# Altium PCB HAL_2.PcbDoc
Units mil, origin at the board's own origin, x right, y up, seen from the top; angles counter-clockwise.
Board outline 5545 x 3120 mil, 2 copper layers (Top Layer, Bottom Layer); 70 components, 32 nets, 213 pads, 88 vias.
Unrouted connection lines stored in the file: 39.
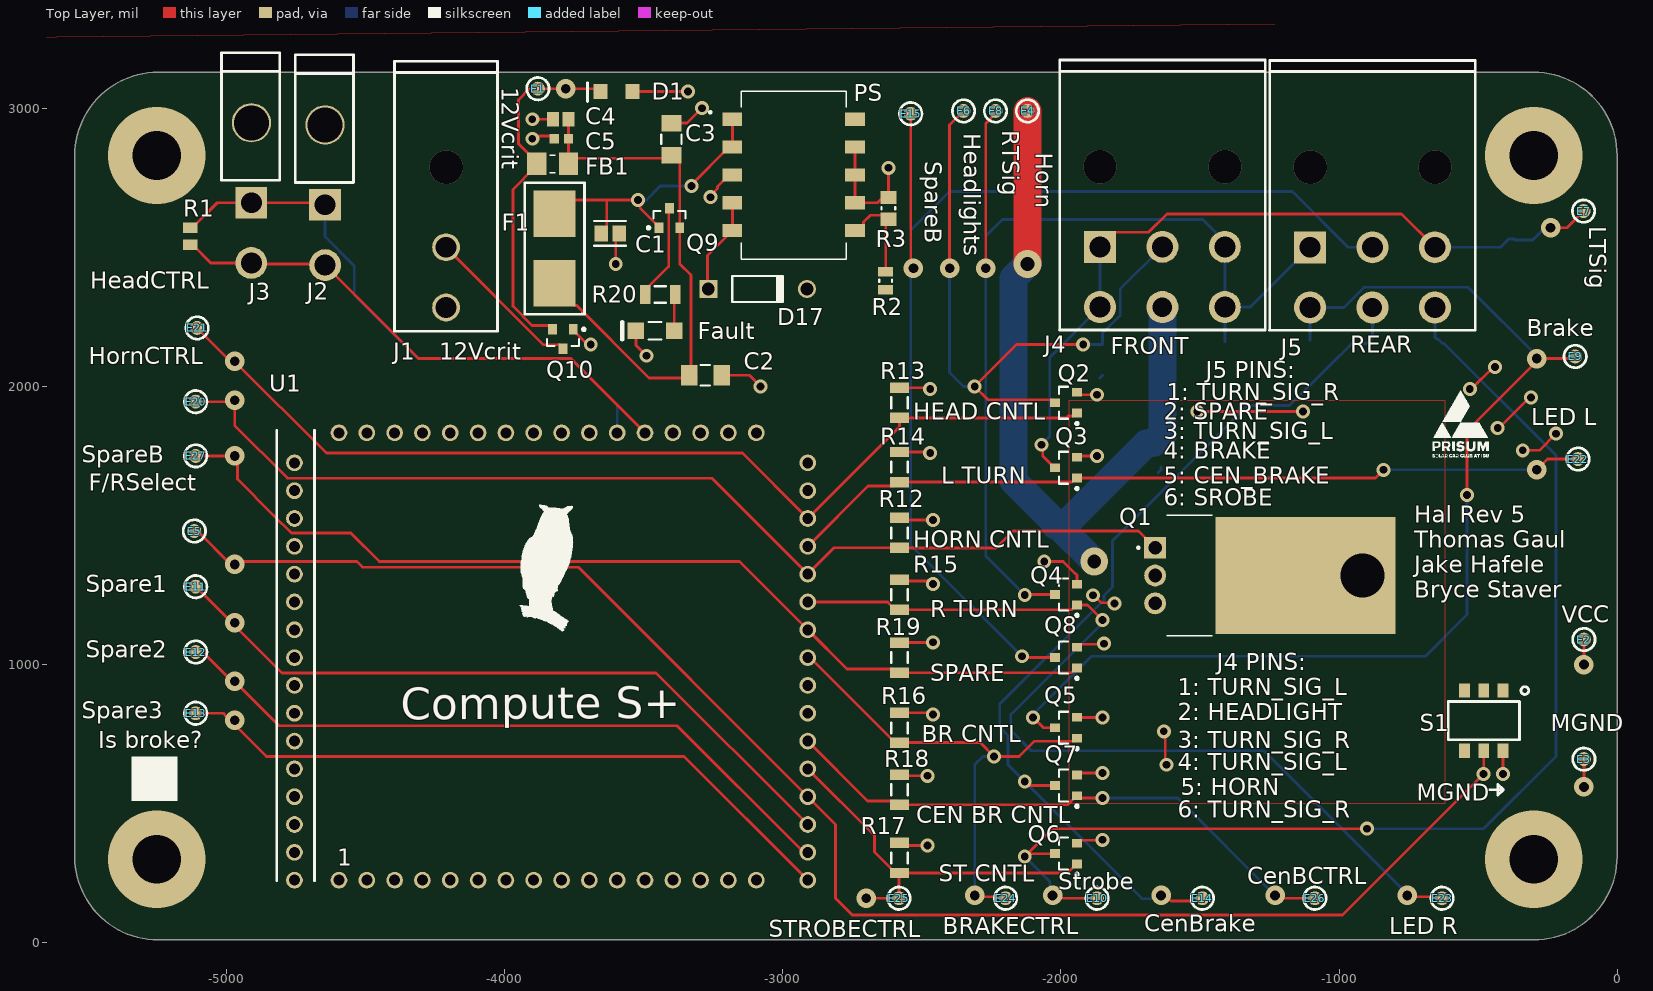
[diagram p0: Top Layer view]
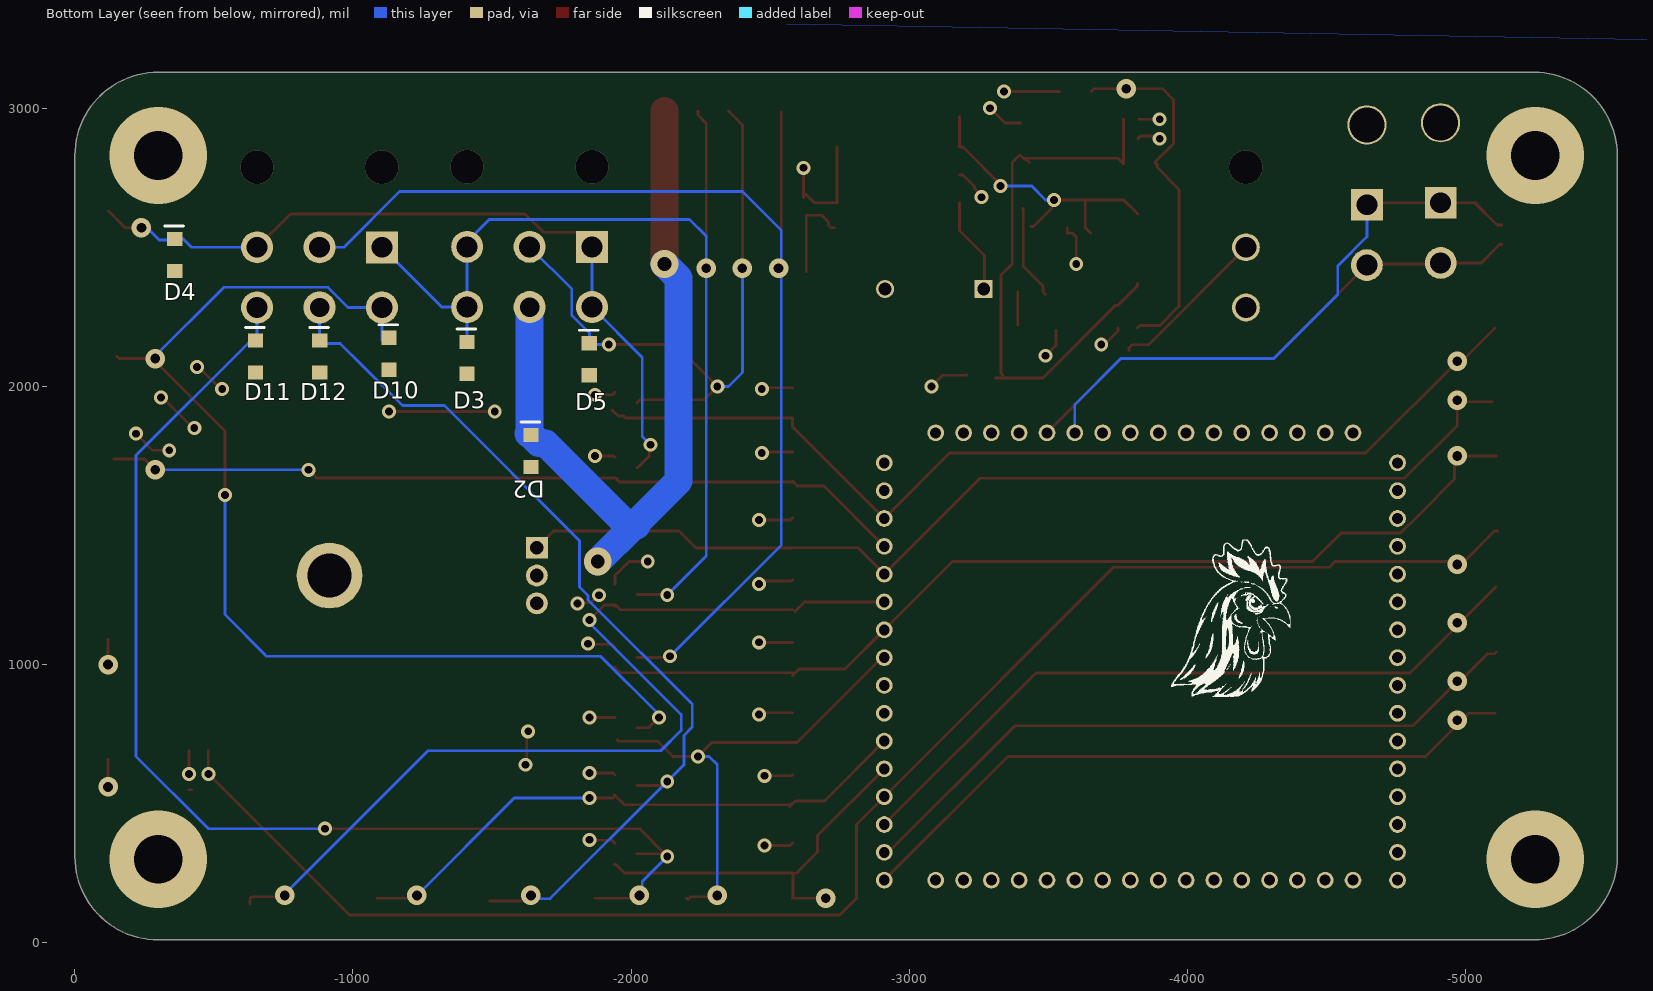
[diagram p1: Bottom Layer view, seen from below]

## Layer stack, top to bottom
Top Solder: solder mask 0.4, Solder Resist, Dk 3.5
Top Layer: signal copper 1.4
Dielectric 1: dielectric 12.6, FR-4, Dk 4.8
Bottom Layer: signal copper 1.4
Bottom Solder: solder mask 0.4, Solder Resist, Dk 3.5

## Board outline
-5545,310 -5545,2829.37 cw(c-5245,2829.37) -5245,3129.37 -5245,3130 -300,3130 -300.63,3129.37 cw(c-300.63,2829.37) -0.63,2829.37 0,2825 0,310 -0.63,310 cw(c-300.63,310) -300.63,10 -5245,10 cw(c-5245,310)

## Design rules (kind name [scope] priority, off if disabled: settings)
BoardOutlineClearance [All] p1: gap=10 ignorepadtopadclearanceinfootprint=FALSE except(0: Arc-SplitContinuation Track-SplitContinuation SMDPad-SplitContinuation THPad-SplitContinuation Via-SplitContinuation Fill-SplitContinuation Poly-SplitContinuation Region-SplitContinuation Text-SplitContinuation)
Clearance [All] p1: gap=10 ignorepadtopadclearanceinfootprint=FALSE except(0: Arc-Hole Track-Hole SMDPad-Hole THPad-Hole Via-Hole Fill-Hole Poly-Hole Region-Hole Text-Hole)
PolygonConnect [All] p1: connectstyle=Relief reliefconductorwidth=10 reliefentries=4 polygonreliefangle="90 Angle" airgapwidth=10
RoutingVias [All] p1: holewidth=28 width=50 viastyle="Through Hole" minholewidth=28 minwidth=50 maxholewidth=28 maxwidth=50
SolderMaskExpansion [All] p1: expansion=4 istentingtop=FALSE
Width Width_2 [InNet('HORN')] p1: maxlimit=100 minlimit=100 preferedwidth=100 minimp=50.000000 maximp=50.000000 favimp=50.000000
Width Width_1 [All] p2: maxlimit=10 minlimit=10 preferedwidth=10
Width [All] p3: maxlimit=40 minlimit=40 preferedwidth=40 minimp=50.000000 maximp=50.000000 favimp=50.000000
30 further rules are at their usual default settings.

## Classes and differential pairs
component class HAL_3: E4 E5 E6 E7 E8 E9 E10 E14 E15 E20 E21 E22 E23 E24 E25 E26 E27 Q1 Q2 Q3 Q4 Q5 Q6 Q7 Q8 R12 R13 R14 R15 R16 R17 R18 R19 S1
component class HAL_2: C1 C2 C3 C4 C5 D1 D2 D3 D4 D5 D10 D11 D12 D17 E1 E2 E3 E11 E12 E13 F1 Fault FB1 J1 J2 J3 J4 J5 PS Q9 Q10 R1 R2 R3 R20 U1

## Components (designator, comment, footprint, x,y, rotation, side; value= is the part's Value field where it differs from the comment)
C1 "25V" FP-GRM21B-0_2-e0_2_0_7-IPC_B -3620,2550 r0 top
C2 "10 uF" FP-CL31-IPC_A -3278.12,2040 r0 top
C3 "1 uF" FP-CL31-IPC_A -3400,2888.12 r90 top
C4 ".1 uF" CAPC2013X140X50LL20T25 -3797.56,2960 r0 top
C5 ".01 uF" CAPC1608X90X35LL15T15 -3795.59,2890 r0 top
D1 "TVS DIODE 12.4V 20.1V DO219AB" "TVS DIODE 12.4V 20.1V DO219AB" -3598,3060 r0 top
D2 "TVS DIODE 12.4V 20.1V DO219AB" "TVS DIODE 12.4V 20.1V DO219AB" -1640,1768 r270 bottom
D3 "TVS DIODE 12.4V 20.1V DO219AB" "TVS DIODE 12.4V 20.1V DO219AB" -1410,2103 r270 bottom
D4 "TVS DIODE 12.4V 20.1V DO219AB" "TVS DIODE 12.4V 20.1V DO219AB" -360,2473 r270 bottom
D5 "TVS DIODE 12.4V 20.1V DO219AB" "TVS DIODE 12.4V 20.1V DO219AB" -1850,2098 r270 bottom
D10 "TVS DIODE 12.4V 20.1V DO219AB" "TVS DIODE 12.4V 20.1V DO219AB" -1130,2118 r270 bottom
D11 "TVS DIODE 12.4V 20.1V DO219AB" "TVS DIODE 12.4V 20.1V DO219AB" -650,2108 r270 bottom
D12 "TVS DIODE 12.4V 20.1V DO219AB" "TVS DIODE 12.4V 20.1V DO219AB" -880.98,2108 r270 bottom
D17 "1N4001-T" DIOD-DO-41-P-2_V -3090,2350 r0 top
E1 "12V crit" EPAD -3880,3070 r0 top
E2 "VCC" EPAD -120,1090 r0 top
E3 "MGND" EPAD -120,660 r0 top
E4 "HORN" EPAD -2120,2990 r0 top
E5 "F/R Selector" EPAD -5115,1480 r0 top
E6 "HEADLIGHT" EPAD -2350,2990 r0 top
E7 "L T SIGNAL" EPAD -121.31,2630 r0 top
E8 "R T SIGNAL" EPAD -2235,2990 r0 top
E9 "Brake" EPAD -151.31,2107.5 r0 top
E10 "STROBE" EPAD -1870,160 r0 top
E11 "SPARE 1" EPAD -5110,1280 r0 top
E12 "SPARE 2" EPAD -5110,1045 r0 top
E13 "SPARE 3" EPAD -5110,825 r0 top
E14 "CENTER BRAKE" EPAD -1491.67,160 r0 top
E15 "SPARE BREAK" EPAD -2540,2980 r0 top
E20 "HORN CTRL" EPAD -5110,1945 r0 top
E21 "HEADLIGHT CTRL" EPAD -5105,2210 r0 top
E22 "LED T SIGNAL L" EPAD -141.31,1738.75 r0 top
E23 "LED T SIGNAL R" EPAD -630,160 r0 top
E24 "BRAKE CTRL" EPAD -2198.89,160 r0 top
E25 "STROBECTRL" EPAD -2582.15,160 r0 top
E26 "CENTER BRAKE CTRL" EPAD -1087.22,160 r0 top
E27 "SPACR B" EPAD -5110,1750 r90 top
F1 "1A" "OMNIBLOCK FUSE HOLDER" -3820,2495.39 r90 top
Fault "HSMH-C150" AVAG-HSMX-C150_V -3458.9,2200 r180 top
FB1 "HI1206N800R-10" FB_HI1206N800R-10 -3826.89,2800 r0 top
J1 "Power Input 12 V" CONN_2P_MEGAFIT_HORIZONTAL -4210,2283.46 r90 top
J2 "CAN" "Mini-Fit Jr. 2" -4645,2770.71 r180 top
J3 "CAN" "Mini-Fit Jr. 2" -4910,2778.11 r180 top
J4 "FRONT" PCBComponent_1 -2192.87,2171.22 r180 top
J5 "REAR" PCBComponent_1 -1437.87,2169.69 r180 top
PS "R-78AA5.0-1.0SMD-R" CONV_R-78AA5.0-1.0SMD-R -2960.47,2760 r0 top
Q1 "CSD18504KCS" TO254P1651X1067X470-3 -1661.34,1420 r270 top
Q2 "NTR4501NT1G" ONSC-SOT-23-3-318-08_V -1981.63,1941.28 r180 top
Q3 "NTR4501NT1G" ONSC-SOT-23-3-318-08_V -1981.63,1707.59 r180 top
Q4 "NTR4501NT1G" ONSC-SOT-23-3-318-08_V -1981.63,1251.5 r180 top
Q5 "NTR4501NT1G" ONSC-SOT-23-3-318-08_V -1981.63,772.81 r180 top
Q6 "NTR4501NT1G" ONSC-SOT-23-3-318-08_V -1981.63,320.42 r180 top
Q7 "NTR4501NT1G" ONSC-SOT-23-3-318-08_V -1981.63,565.42 r180 top
Q8 "NTR4501NT1G" ONSC-SOT-23-3-318-08_V -1981.63,1025.2 r180 top
Q9 "IRLML6402TRPBF" INTR-SOT-23-3_V -3407.4,2604.84 r0 top
Q10 "IRLML6402TRPBF" INTR-SOT-23-3_V -3790,2170 r180 top
R1 "120 Ohmn" RESC2013X50X40LL20T20 -5130,2540 r90 top
R2 "33k" RESC2013X50X30LL20T20 -2630,2380 r270 top
R3 "8.66k" RESC2013X60X35ML10T20 -2620,2640 r270 top
R12 "1k" RESC3216X70X40LL20T20 -2580,1473.48 r90 top
R13 "1k" RESC3216X70X40LL20T20 -2580,1940.86 r90 top
R14 "1k" RESC3216X70X40LL20T20 -2580,1710 r90 top
R15 "1k" RESC3216X70X40LL20T20 -2580,1251.09 r90 top
R16 "1k" RESC3216X70X40LL20T20 -2580,772.39 r90 top
R17 "1k" RESC3216X70X40LL20T20 -2580,305 r90 top
R18 "1k" RESC3216X70X40LL20T20 -2580,550 r90 top
R19 "1k" RESC3216X70X40LL20T20 -2580,1024.78 r90 top
R20 "1k" RESC3216X70X40LL20T20 -3440,2330 r0 top
S1 "Slide Switch" "Slide Switch" -686.69,827.8 r180 top
U1 "S+" "Compute S+" -4595,225 r0 top

## Footprints (in the part's own frame and the unit in brackets; to place one, negate y for a bottom-side part, rotate by r counter-clockwise, add the part's x,y. Pads: shape width x height; smd on the part's side, far side on the other; paste and mask are expansions set on the pad)
AVAG-HSMX-C150_V [mm] "SMD, 2-Leads, Body 3.2x1.6mm"
  rect 1.5x1.5 smd: 1(-1.75,0) 2(1.75,0)
  silkscreen extent -0.6,-0.8 3,0.8, body extent -1.6,-0.8 1.6,0.8, height 1.1
CAPC1608X90X35LL15T15 [mm] "Chip Capacitor, 2-Leads, Body 1.60x0.81mm, IPC High Density"
  rect 0.85x0.9 smd: 1(-0.65,0) 2(0.65,0)
  body extent -0.88,-0.48 0.87,0.48, height 0.9
CAPC2013X140X50LL20T25 [mm] "Chip Capacitor, 2-Leads, Body 2.00x1.25mm, IPC High Density"
  rect 1.1x1.35 smd: 1(-0.7,0) 2(0.7,0)
  body extent -1.1,-0.72 1.1,0.72, height 1.4
"Compute S+" [mil]
  round 60 hole 39.37: CANH(1000,1607.95) CANL(1100,1607.95) GND(-160,900) GND(100,1607.95) GND(600,0) GND(900,1607.95) GND(1685,600) GND(1685,1400) PA00(-160,1500) PA01(-160,1400) PA02(-160,1300) PA03(-160,1200) PA04(-160,300) PA05(-160,200) PA06(-160,100) PA07(-160,0) PA08(0,0) PA09(100,0) PA10(200,0) PA11(300,0) PA12(1200,0) PA13(1300,0) PA14(1400,0) PA15(1500,0) PA16(1685,0) PA17(1685,100) PA18(1685,200) PA19(1685,300) PA20(1685,800) PA21(1685,900) PA22(1685,1000) PA23(1685,1100) PA24(1685,1200) PA25(1685,1300) PA27(1500,1607.95) PA28(1400,1607.95) PA30(1300,1607.95) PA31(1200,1607.95) PB00(500,1607.95) PB01(400,1607.95) PB02(300,1607.95) PB03(200,1607.95) PB04(-160,1100) PB05(-160,1000) PB06(-160,700) PB07(-160,600) PB08(-160,500) PB09(-160,400) PB10(400,0) PB11(500,0) PB12(800,0) PB13(900,0) PB14(1000,0) PB15(1100,0) PB16(1685,400) PB17(1685,500) PB30(700,1607.95) PB31(600,1607.95) VDD(-160,800) VDD(0,1607.95) VDD(700,0) VDD(800,1607.95) VDD(1685,700) VDD(1685,1500)
  silkscreen extent -224,-2 842,1617, body extent -261,-84 1774,1726, height 549
CONN_2P_MEGAFIT_HORIZONTAL [mm]
  round 2.54 hole 1.905: 1(0,0) 2(5.5,0)
  silkscreen extent -2.16,-4.7 22.48,4.7, body extent -0.64,-4.16 21.33,4.19, height 14.06
CONV_R-78AA5.0-1.0SMD-R [mm]
  rect 1.8x1.2 smd: 1(-5.6,5.08) 2(-5.6,2.54) 3(-5.6,0) 4(-5.6,-2.54) 5(-5.6,-5.08) 6(5.6,-5.08) 7(5.6,-2.54) 8(5.6,0) 9(5.6,2.54) 10(5.6,5.08)
  silkscreen extent -7.72,-7.68 4.8,7.62
DIOD-DO-41-P-2_V [mm] "2-Leads, Axial Lead, Body 4.635x2.36mm, Pin Spacing 9mm"
  rect 1.65x1.65 hole 1.15: 1(-4.5,0)
  round 1.65 hole 1.15: 2(4.5,0)
  silkscreen extent -2.32,-1.18 2.32,1.18, body extent -4.93,-1.18 4.93,1.18, height 2.35
EPAD [mil]
  round 50 smd: 1(0,0)
  silkscreen extent -40,-40 40,40
FB_HI1206N800R-10 [mm]
  rect 1.76x2.06 smd: 1(-1.445,0) 2(1.445,0)
  silkscreen extent -0.25,-0.8 0.25,0.8
FP-CL31-IPC_A [mil]
  rect 59.27x73.16 smd paste+0 mask+0: 1(-58.12,0) 2(58.12,0)
  silkscreen extent -17,-37 17,37, body extent -107,-56 107,56, height 10
FP-GRM21B-0_2-e0_2_0_7-IPC_B [mil]
  rect 49.4x57.33 smd paste+0 mask+0: 1(-32.51,0) 2(32.51,0)
  silkscreen extent -57,-44 57,44, body extent -67,-39 67,39, height 10
INTR-SOT-23-3_V [mm] "SOT23, 3-Leads, Body 2.92x1.3mm, Pitch 1.9mm"
  rect 0.802x0.972 smd: 1(-0.95,-0.885) 2(0.95,-0.885) 3(0,0.885)
  silkscreen extent -2.03,-1.01 1.46,0.64, body extent -1.46,-0.65 1.46,0.65, height 1.12
"Mini-Fit Jr. 2" [mm]
  rect 2.9x2.9 hole 1.9: 1(0,3)
  round 2.9 hole 1.9: 2(0,8.5)
  round 3.578 hole 3.2: 3(0,-4.3)
  silkscreen extent -2.6,-10.7 2.73,0.95, body extent -2.7,-10.9 3.1,9.03, height 11.4
"OMNIBLOCK FUSE HOLDER" [mm]
  rect 4.24x3.81 smd: 1(-3.185,0) 2(3.185,0)
  silkscreen extent -6,-2.73 6,2.73, body extent -4.92,-2.52 4.92,2.51, height 3.81
ONSC-SOT-23-3-318-08_V [mm] "SOT23, 3-Leads, Body 2.92x1.3mm, Pitch 0.95mm"
  rect 0.9x0.8 smd: 1(-1,0.95) 2(-1,-0.95) 3(1,0)
  silkscreen extent -1.13,-1.46 0.65,2.02, body extent -0.65,-1.46 0.65,1.46, height 1.11
PCBComponent_1 [mil]
  rect 115x115 hole 75: 1(-333.46,-330.31)
  round 115 hole 75: 2(-557.87,-330.31) 3(-782.28,-330.31) 4(-333.46,-113.78) 6(-782.28,-113.78)
  round 115 hole 70: 5(-557.87,-113.78)
  silkscreen extent -927,-1002 -187,-32, body extent -908,-956 -209,-92, height 594
RESC2013X50X30LL20T20 [mm] "Chip Resistor, 2-Leads, Body 2.00x1.25mm, IPC High Density"
  rect 0.85x1.35 smd: 1(-0.825,0) 2(0.825,0)
  silkscreen extent -0.1,-0.58 0.1,0.58, body extent -1.1,-0.72 1.1,0.72, height 0.5
RESC2013X50X40LL20T20 [mm] "Chip Resistor, 2-Leads, Body 2.00x1.25mm, IPC High Density"
  rect 0.95x1.35 smd: 1(-0.775,0) 2(0.775,0)
  body extent -1.1,-0.72 1.1,0.72, height 0.5
RESC2013X60X35ML10T20 [mm] "Chip Resistor, 2-Leads, Body 2.00x1.25mm, IPC Low Density"
  rect 1.2x1.45 smd: 1(-1,0) 2(1,0)
  silkscreen extent -0.1,-0.63 0.1,0.63, body extent -1.05,-0.67 1.05,0.67, height 0.6
RESC3216X70X40LL20T20 [mm] "Chip Resistor, 2-Leads, Body 3.20x1.60mm, IPC High Density"
  rect 0.95x1.7 smd: 1(-1.375,0) 2(1.375,0)
  silkscreen extent -0.5,-0.75 0.5,0.75, body extent -1.7,-0.9 1.7,0.9, height 0.7
"Slide Switch" [mm]
  rect 1x1.3 smd: 1(-7,-2) 2(-5.25,-2) 3(-3.5,-2) 4(-7,3.5) 5(-5.25,3.5) 6(-3.5,3.5)
  silkscreen extent -9.35,-2.35 -2,2.5
TO254P1651X1067X470-3 [mm]
  rect 2x2 hole 1.24: 1(0,0)
  round 2 hole 1.24: 2(2.54,0) 3(5.08,0)
  rect 10.67x16.43 smd: 4(2.54,13.75)
  round 6 hole 4: 4.1(2.54,18.925)
  silkscreen extent -2.98,-1.62 8.06,5.22, body extent -5.08,0 5.08,4.55, height 19.65
"TVS DIODE 12.4V 20.1V DO219AB" [mil]
  rect 51x55 smd: 3(-57,0) 4(58,0)
  silkscreen extent -104,-36 -104,31

## Part data
C1: library part CMP-03020-001866-1, "C0805 10 pF C0G 30ppm/°C 2.00% 50 V", Capacitance=22uF, Case Code (Imperial)=0805, Case Code (Metric)=2012, Dielectric=X5R, Max Operating Temperature=85°C, Min Operating Temperature=-55°C, Package Quantity=3000, Resistor Type=Ceramic, Tolerance=20%, Case/Package=0805, Depth=1.25mm, Height=1.25mm, Lead Free="Lead Free", Length=2mm, Material=Ceramic, Mount="Surface Mount", Packaging="Tape and Reel", REACH SVHC="No SVHC", Termination=SMD/SMT, Thickness=0.057inch, Voltage=25V, Voltage Rating=25V, Voltage Rating (DC)=25V, Weight=0.000335oz, Width=1.25mm
C2 C3: library part CMP-13271-002819-1, "Cap Ceramic 10uF 16V X5R ±10% SMD 1206 +85°C Embossed T/R", Capacitance=10uF, Case Code (Imperial)=1206, Case Code (Metric)=3216, Dielectric=X5R, Max Operating Temperature=85°C, Min Operating Temperature=-55°C, Tolerance=10%, Voltage=16V, Case/Package=1206, Contact Plating=Tin, Depth=1.6mm, Height=1.6mm, Lead Free="Lead Free", Length=3.2mm, Material=Ceramic, Mount="Surface Mount", Packaging="Tape and Reel", Radiation Hardening=No, Thickness=0.071inch, Voltage Rating=16V, Voltage Rating (DC)=16V, Width=0.063inch
C4: library part CMP-2007-04740-1, Manufacturer="AVX Interconnect / Elco", Part Number=08051C104M4Z2A
C5: library part CMP-2006-04438-1, Manufacturer="AVX Interconnect / Elco", Part Number=06035C472K4T4A
D17: library part CMP-0639-00006-2, "1.0 A Rectifier, 15 pF, 50 V, -65 to 150 degC, 2-Pin DO-41 Plastic, RoHS, Tape and Reel", Manufacturer="Diodes Inc", Max. Average Rectified Current IO (A)=1, Operating Temperature Range (degC)="-65 to 150", ComponentLink1Description="Manufacturer URL", ComponentLink1URL=http://diodes.com/, ComponentLink2Description=Datasheet, ComponentLink2URL=http://diodes.com/datasheets/ds28002.pdf, CT (pF)=15, DatasheetVersion="Rev. 8-2", Max. IFSM (A)=30, Max. IR (uA)=5, Mounting Technology="Through Hole", PackageDescription="2-Pin Axial Lead, Body 4.635 x 2.36 mm, Lead Spread 25.4 mm", PackageReference=DO-41-P-2, Packing="Tape and Reel", PartNumber=1N4001-T, RoHS=TRUE, VF (V)=1, VRRM (V)=50
E1 E2 E3 E4 E5 E6 E7 E8 E9 E10 E11 E12 E13 E14 E15 E20 E21 E22 E23 E24 E25 E26 E27: library part EPAD, "Pad for probing signals"
F1: library part CMP-2000-05464-1, "Fuse Holder, 20 A, 500 V, -50 to 145 degC, 4-Pin THD, RoHS", Digikey-Fuse=http://www.digikey.com/product-detail/en/littelfuse-inc/0451001.MRL/F2577CT-ND/813055, Digikey-Socket=http://www.digikey.com/product-detail/en/littelfuse-inc/01550900M/F1889-ND/2519878
Fault: library part CMP-2000-06426-1, "LED Uni-Color Red, 65 mW, 25 mA, -40 to 85 degC, 2-Pin SMD, RoHS, Tape and Reel", Emitting Color=Red, Forward Current=25mA, Forward Voltage=2.6V, Manufacturer=Avago, Operating Temp Range=-40Cto85C, Operating Temperature Classification=Industrial, Package Description="2-Pin Surface Mount Device, Body 3.2 x 1.6 mm", Package Reference=HSMX-C150, Package Type=ChipLed, Power Dissipation=78W, Reverse Voltage=5V, Test Current (It)=20mA, Chip Material=GaAlAs, Datasheet URL=http://media.digikey.com/pdf/Data%20Sheets/Avago%20PDFs/HSMz-Czzz.pdf, Datasheet Version=03/2012, DELETED=Compliant, Dominant Wave Length=639nm, High Brightness=No, Lens Dimensions=2x1.6x0.6mm, Lens Type=ColorlessDiffused, Lum Intensity=17mcd, Luminous Intensity=17mcd, Main Category=ChipLED, Manufacturer URL=http://www.avagotech.com/, Mounting=SurfaceMount, Mounting Technology=SurfaceMount, Number of  Elements=1, Packaging=TapeandReel, Peak Wavelength=660nm, Pin Count=2, Product Depth (mm)=1.6mm, Product Height (mm)=1.1mm, Product Length (mm)=3.2mm, Rad Hardened=No, Shape Type=Rectangular, Type=Uni-Color, Viewing Angle=170deg
FB1: library part 80_FB_1206, "Ferrite Chip, 1 Function(s), 3A, 2 Pin(s)", Package="1206 Laird-Signal Integrity", Check_prices=https://www.snapeda.com/parts/HI1206N800R-10/Laird-Signal%20Integrity%20Products/view-part/296889/?ref=eda, Digi-Key_Part_Number=240-2409-1-ND, MF="Laird-Signal Integrity", MP=HI1206N800R-10, Purchase-URL=https://pricing.snapeda.com/search/part/HI1206N800R-10/?ref=eda, SnapEDA_Link=https://www.snapeda.com/parts/HI1206N800R-10/Laird-Signal%20Integrity%20Products/view-part/296889/?ref=snap
J1: library part MINI_6P_2x3, "Rectangular Power Connector", DigiKey Part Number=WM11969-ND, Manufacturer=Molex, Manufacturer Part Number=0768250002, SchematicInformation=MegaFit_2P
J2 J3: library part "Mini-Fit Jr. 2-pin", "Mini-Fit Jr. 2-pin Right Angle Mini-Fit Jr. 2-pin", Color=Natural, Manufacturer="Molex Inc", Manufacturer Part Number=0039300020, Category="Connectors, Interconnects", ComponentLink1Description=http://www.molex.com/pdm_docs/sd/039300020_sd.pdf, ComponentLink1URL=http://www.molex.com/pdm_docs/sd/039300020_sd.pdf, Connector Type="Header, Shrouded", Contact Finish=Tin, Contact Finish Thickness="200µin (5.08µm)", Contact Mating Length=-, Contact Type="Male Pin", Datasheet=http://www.molex.com/pdm_docs/sd/039301020_sd.pdf, Fastening Type="Locking Ramp", Features="Board Lock", Mounting Type="Through Hole, Right Angle", Number of Positions=2, Number of Positions Loaded=All, Number of Rows=2, Ordering=http://search.digikey.com/scripts/DkSearch/dksus.dll?Detail&name=WM1351-ND, Packaging=Tray, Pitch=-, Pricing 1="1=0.77, 10=0.674, 50=0.6078, 100=0.5815, 250=0.5286, 500=0.47574, 1000=0.42288, 2500=0.38324, 5000=0.37002 (USD)", RoHS="RoHS Compliant", Row Spacing="0.165\" (4.20mm)", Stock 1=371, Supplier 1=Digi-Key, Termination=Solder
J4: library part "6 pin Megafit", "768250006-https://www.digikey.com/en/products/detail/molex/0768250006/5639613?s=N4IgTCBcDaIOwDYAcYCsAGTCQF0C%2BQA", ComponentLink1Description="New link", ComponentLink1URL=*https://www.digikey.com/en/products/detail/molex/0768250006/5639613?s=N4IgTCBcDaIOwDYAcYCsAGTCQF0C%2BQA
J5: library part MINI_6P_2x3, "Rectangular Power Connector", ComponentLink1Description="New link", ComponentLink1URL=*https://www.digikey.com/en/products/detail/molex/0768250006/5639613?s=N4IgTCBcDaIOwDYAcYCsAGTCQF0C%2BQA
PS: "1A DC/DC-Converter 'INNOLINE' SMD reg", Package="SMD-10 Recom Power", Digi-Key_Part_Number=945-1044-1-ND, DigiKey-Purchase-URL=https://snapeda.com/shop?store=DigiKey&id=480105, MF="Recom Power", Mouser-Purchase-URL=https://snapeda.com/shop?store=Mouser&id=480105, MP=R-78AA5.0-1.0SMD-R, SnapEDA_Link=https://www.snapeda.com/parts/R-78AA5.0-1.0SMD-R/Recom%20Power/view-part/480105/?ref=snap
Q1: library part CMP-2000-04987-1, "HEXFET(R) Power P-Channel MOSFET, -20 V, -3.7 A, -55 to 150 degC, 3-Pin SOT-23, RoHS, Tape and Reel", Package="TO-220-3 Texas Instruments", Availability=Good, Check_prices=https://www.snapeda.com/parts/CSD18502KCS/Texas%20Instruments/view-part/277573/?ref=eda, MF="Texas Instruments", MP=CSD18502KCS, Price=None, Purchase-URL=https://pricing.snapeda.com/search/part/CSD18502KCS/?ref=eda, SnapEDA_Link=https://www.snapeda.com/parts/CSD18502KCS/Texas%20Instruments/view-part/277573/?ref=snap
Q2 Q3 Q4 Q5 Q6: library part CMP-2000-04987-1, "HEXFET(R) Power P-Channel MOSFET, -20 V, -3.7 A, -55 to 150 degC, 3-Pin SOT-23, RoHS, Tape and Reel", Manufacturer="On Semiconductor", Package Type=SOT-23-3, Channel Polarity="N Channel", Ciss Typ (pF)=200, ComponentLink1Description="Manufacturer URL", ComponentLink1URL=http://www.onsemi.com/, ComponentLink2Description=Datasheet, ComponentLink2URL=http://www.onsemi.cn/pub_link/Collateral/NTR4501N-D.PDF, ComponentLink3Description="Package Specification", ComponentLink3URL=http://www.onsemi.cn/pub_link/Collateral/318-08.PDF, Configuration=Single, Coss Typ (pF)=80, Crss Typ (pF)=50, DatasheetVersion="Rev. 13", Mounting Technology="Surface Mount", PackageDescription="3-Pin Small Outline Transistor, Body 2.92 x 1.3 mm, Pitch 0.95 mm", PackageReference=SOT-23-3-318-08, PackageVersion="Rev. AP, 11/2009", Packing="Tape and Reel", PartNumber=NTR4501NT1G, PD Max (W)=1.25, Qrr Typ (nC)=3, RoHS=Pb-Free, V(BR)DSS Min (V)=20, VGS Max (V)=12, VGS(th) Max (V)=1.2
Q7: library part CMP-1058-00732-1, "Power MOSFET, 20 V, 3.2 A, Single N-Channel, 3-Pin SOT-23, Pb-Free, Tape and Reel", Manufacturer="On Semiconductor", Package Type=SOT-23-3, Channel Polarity="N Channel", Ciss Typ (pF)=200, ComponentLink1Description="Manufacturer URL", ComponentLink1URL=http://www.onsemi.com/, ComponentLink2Description=Datasheet, ComponentLink2URL=http://www.onsemi.cn/pub_link/Collateral/NTR4501N-D.PDF, ComponentLink3Description="Package Specification", ComponentLink3URL=http://www.onsemi.cn/pub_link/Collateral/318-08.PDF, Configuration=Single, Coss Typ (pF)=80, Crss Typ (pF)=50, DatasheetVersion="Rev. 13", Mounting Technology="Surface Mount", PackageDescription="3-Pin Small Outline Transistor, Body 2.92 x 1.3 mm, Pitch 0.95 mm", PackageReference=SOT-23-3-318-08, PackageVersion="Rev. AP, 11/2009", Packing="Tape and Reel", PartNumber=NTR4501NT1G, PD Max (W)=1.25, Qrr Typ (nC)=3, RoHS=Pb-Free, V(BR)DSS Min (V)=20, VGS Max (V)=12, VGS(th) Max (V)=1.2
Q8: library part CMP-07173-000088-1, "MOSFET P-CH 40V 10.8A DPAK", Manufacturer="On Semiconductor", Package Type=SOT-23-3, Channel Polarity="N Channel", Ciss Typ (pF)=200, ComponentLink1Description="Manufacturer URL", ComponentLink1URL=http://www.onsemi.com/, ComponentLink2Description=Datasheet, ComponentLink2URL=http://www.onsemi.cn/pub_link/Collateral/NTR4501N-D.PDF, ComponentLink3Description="Package Specification", ComponentLink3URL=http://www.onsemi.cn/pub_link/Collateral/318-08.PDF, Configuration=Single, Coss Typ (pF)=80, Crss Typ (pF)=50, DatasheetVersion="Rev. 13", Mounting Technology="Surface Mount", PackageDescription="3-Pin Small Outline Transistor, Body 2.92 x 1.3 mm, Pitch 0.95 mm", PackageReference=SOT-23-3-318-08, PackageVersion="Rev. AP, 11/2009", Packing="Tape and Reel", PartNumber=NTR4501NT1G, PD Max (W)=1.25, Qrr Typ (nC)=3, RoHS=Pb-Free, V(BR)DSS Min (V)=20, VGS Max (V)=12, VGS(th) Max (V)=1.2
Q9 Q10: library part CMP-2000-04987-1, "HEXFET(R) Power P-Channel MOSFET, -20 V, -3.7 A, -55 to 150 degC, 3-Pin SOT-23, RoHS, Tape and Reel", Drain-Source On Resistance-Max=0.065O, Drain-to-Source Voltage [Vdss]=20V, Manufacturer="International Rectifier", Package Description="3-Pin Small Outline Transistor, Body 2.92 x 1.3 mm, Pitch 0.95 mm", Package Reference=SOT-23-3, Rated Power Dissipation=1.3W, Channel Type=P-Channel, Datasheet URL=http://datasheet.octopart.com/IRLML6402TRPBF-International-Rectifier-datasheet-93882.pdf, Datasheet Version=Feb-05, Manufacturer URL=http://internationalrectifier.com/, Qg Gate Charge=8nC
R1: library part CMP-2003-04517-1, "RK73B2BTTD102J", Manufacturer=Susumu, Part Number=RR1220P-121-D
R2: library part CMP-2003-04517-1, "RK73B2BTTD102J", Manufacturer="Vishay Dale", Part Number=CRCW080533K0JNEA
R3: library part CMP-2001-01296-1, "RC0805FR-078K66L", Manufacturer=Yageo, Part Number=RC0805FR-078K66L
R12 R13 R15 R19 R20: library part CMP-2003-04517-1, "RK73B2BTTD102J", Manufacturer="KOA Speer", Part Number=RK73B2BTTD102J
R14 R16 R17 R18: library part CMP-26527-000121-1, "RES 10K OHM 1% 1/8W 0805", Manufacturer="KOA Speer", Part Number=RK73B2BTTD102J
U1: "Need to get 4 of PPPC161LFBN-RC", Datasheet=https://media.digikey.com/pdf/Data%20Sheets/Sullins%20PDFs/Female_Headers.100_DS.pdf, Digi-Key=https://www.digikey.com/product-detail/en/sullins-connector-solutions/PPPC161LFBN-RC/S7049-ND/810188
D1 D2 D3 D4 D5 D10 D11 D12: ComponentLink1Description=Digikey, ComponentLink1URL=https://www.digikey.com/product-detail/en/vishay-semiconductor-diodes-division/VTVS12ASMF-M3-08/112-VTVS12ASMF-M3-08CT-ND/7055981, ComponentLink2Description=Datasheet, ComponentLink2URL=http://www.vishay.com/docs/85891/vtvs3v3asmf.pdf

## Via types
v1: diameter 50, hole 28, Top Layer to Bottom Layer, tented both sides, 43 vias
v2: diameter 70, hole 35, Top Layer to Bottom Layer, 22 vias
v3: diameter 50, hole 28, Top Layer to Bottom Layer, 12 vias
v4: diameter 120.08, hole 120.08, Top Layer to Bottom Layer, 5 vias
v5: diameter 350, hole 175, Top Layer to Bottom Layer, 4 vias
v6: diameter 100, hole 50, Top Layer to Bottom Layer, 1 vias
v7: diameter 100, hole 50, Top Layer to Bottom Layer, tented both sides, 1 vias

## Nets (pads, with @x,y where several pads share a name; then routed paths per layer and width w, separated by ;. In a path a pad name is that pad's centre, name@x,y a point inside that pad or via, vN(x,y) a via of type N, cw(c..) or ccw(c..) an arc to the next point about the centre after c; other vN are vias at no path point)
+12V: C1.1 F1.2 PS.1 PS.2 Q9.1 | length 1115
  Top Layer w10: F1.2 -3770.79,2670 -3632.81,2670 -3542.07,2670 -3532.51,2670 v3(-3520,2670) -3512.35,2662.35 -3512.35,2640.89 -3446.3,2574.84 Q9.1@-3437.4,2574.84 ; C1.1 -3632.81,2569.7 -3632.81,2667.19 -3630,2670 ; v3(-3327.97,2720) -3327.97,2724.79 -3192.76,2860 PS.2 -3180.47,2860.47 -3180.47,2870 PS.1@-3180.47,2970
  Bottom Layer w10: v3(-3520,2670) -3490,2670 -3440,2720 v3(-3327.97,2720)
BRAKE: D10.3 E9.1 J5.4 Q5.3 | length 4045
  Top Layer w10: v1(-2100,810) -2062.81,772.81 Q5.3 ; v1(-540,1610) -540,1840 -280,2100 -158.81,2100 E9.1
  Bottom Layer w10: v1(-2100,810) -2100,820 -1890,1030 -690,1030 -540,1180 v1(-540,1610) ; D10.3@-1104.41,2164.41 J5.4 ; J5.4@-1090,2300 -1073.46,2283.46 -982.53,2283.46 -910.03,2355.96 -535.96,2355.96 v2@-280,2100
  other v2: -290,2100
BRAKE_CTRL: E24.1 Q5.1 R16.1 U1.PA20 | length 1804.7
  Top Layer w10: U1.PA20 -2901.51,1025 -2596.51,720 R16.1@-2580,720 ; R16.1 -2578.26,720 -2290,720 v1(-2240,670) -2150,670 -2095.34,724.66 -1954.97,724.66 -1950,729.63 Q5.1@-1950,730 ; v2(-2310,170) -2305,165 -2213.89,165 -2203.89,155 E24.1
  Bottom Layer w10: v2(-2310,170) -2310,640 -2280,670 v1(-2240,670)
CANH: J2.1 J3.1 R1.2 U1.CANH | length 2104.9
  Top Layer w10: R1.2@-5130,2580 -5112.64,2580 -5032.64,2660 J3.1 J2.1@-4640,2660
  Bottom Layer w10: J2.1 -4645,2538.01 -4540,2433.01 -4540,2330 -4310,2100 -3760,2100 -3595,1935 -3595,1835 U1.CANH@-3590,1830
CANL: J2.2 J3.2 R1.1 U1.CANL | length 1918.1
  Top Layer w10: R1.1 -5122.13,2509.49 -5056.1,2443.47 -4916.53,2443.47 J3.2@-4910,2450 ; J3.2 -4906.3,2439.76 -4659.76,2439.76 J2.2@-4640,2420 ; J2.2 -4308.94,2100 -3762.05,2100 -3511.33,1849.28 -3500.72,1849.28 U1.CANL@-3500,1850
CENTER_BRAKE: D12.3 E14.1 J5.5 Q7.3 | length 3356.3
  Top Layer w10: v1(-2130,580) -2115.42,565.42 Q7.3 ; v2(-1640,170) -1624.14,170 -1604.14,150 E14.1@-1491.67,150
  Bottom Layer w10: v2(-1640,170) -1651.48,158.52 -1708.52,158.52 v1(-2130,580) -2190,640 -2190,745.15 -2220,775.15 -2220,857.64 -1844.97,1232.66 -1844.97,1248.46 -1815,1278.43 -1815,1445 -1329.22,1930.78 -1177.95,1930.78 -1035.37,2073.37 -954.23,2154.5 -901.5,2154.5 -880,2176 J5.5
CENTER_BRAKE_CTRL: E26.1 Q7.1 R18.1 U1.PB17 | length 2094.8
  Top Layer w10: U1.PB17 -2694.57,509.57 -2589.57,509.57 R18.1@-2575.87,495.87 ; R18.1@-2570,490 R18.1@-2575.87,495.87 ; Q7.1 -1934.24,520 v1(-1850,520) ; Q7.1@-1940,530 -1942.24,530 -1976.38,495.87 R18.1@-2575.87,495.87 ; v2(-1230,170) -1220,160 E26.1
  Bottom Layer w10: v1(-1850,520) -1580,520 v2(-1230,170)
"F/R Selecter": E5.1 S1.5 U1.PA19 | length 5651.1
  Top Layer w10: E5.1 -5104.18,1480 -4984.18,1360 v2(-4970,1360) -4960,1370 -4530,1370 -4510,1350 -3735,1350 -2920,535 U1.PA19@-2920,530 ; U1.PA19@-2900,520 -2900,515 -2810,425 -2810,160 -2750,100 -987.64,100 v1(-481.1,606.54) ; v1@-480,606.54 S1.5
  Bottom Layer w10: U1.PA19@-2910,520 U1.PA19@-2905,525
HEADLIGHT: D5.3 E6.1 J4.2 Q2.3 | length 2337.5
  Top Layer w10: v2@-2400,2430 -2400,2940 E6.1 ; Q2.3 -2031.75,1952.03 -2262.03,1952.03 v1(-2310,2000) -2160,2150 v1(-1920,2150)
  Bottom Layer w10: v2@-2400,2420 -2400,2050 -2350,2000 v1(-2310,2000) ; v1(-1920,2150) -1850,2150 D5.3 -1850,2191.88 -1786.91,2254.97 -1786.91,2349.63 J4.2
  other v2: -2400,2425
HEADLIGHT_CTRL: E21.1 Q2.1 R13.1 U1.PA25 | length 3623.1
  Top Layer w10: E21.1 v2@-4977.5,2082.5 ; v2(-4970,2090) -4640,1760 -3145,1760 -2920,1535 U1.PA25@-2920,1530 ; U1.PA25 -2580,1855 R13.1 -1979.97,1886.73 -1973.57,1893.13 -1954.97,1893.13 Q2.1@-1943.24,1904.86 ; Q2.1 Q2.1@-1931.51,1914.63
HORN: D2.3 E4.1 J4.5 Q1.2 Q1.4 Q1.4.1 | length 2753.1
  Top Layer w10: v6@-2130.96,2429.04 v6(-2120,2440)
  Top Layer w100: v6(-2120,2440) E4.1
  Bottom Layer w10: J4.5 J4.5@-1631.39,2281.39
  Bottom Layer w100: v6(-2120,2440) -2170,2390 -2170,1660 -2010,1500 ; -2020,1500 -2010,1500 ; v7(-1880,1370) -2010,1500 ; D2.3 -1669.5,1795.5 -1692.35,1795.5 -1987.85,1500 -2010,1500 ; J4.5 -1635,1835 D2.3@-1630,1830
HORN_CTRL: E20.1 Q1.1 R12.1 U1.PA23 | length 3828.7
  Top Layer w10: E20.1@-5095,1945 v2@-4980,1945 ; v2@-4980,1950 -4970,1940 -4970,1860 -4780,1670 -3255,1670 U1.PA23 -2815,1420 R12.1@-2580,1420 ; R12.1 -2232.81,1419.34 -2172.15,1480 -1721.34,1480 Q1.1
  other v2: -4970,1950
LED_T_SIGNAL_L: E22.1 Q3.1 R14.1 U1.PA24 | length 2895.8
  Top Layer w10: U1.PA24 -2692.83,1642.17 -2597.83,1642.17 R14.1@-2580,1660 ; R14.1 -1958.55,1655.87 -1950,1664.41 Q3.1@-1950,1670 ; Q3.1 -1940.29,1670.19 -869.81,1670.19 v1(-840,1700) ; v2(-290,1700) -251.25,1738.75 E22.1
  Bottom Layer w10: v1(-840,1700) v2(-290,1700)
LED_T_SIGNAL_R: E23.1 Q4.1 R15.1 U1.PA22 | length 3453.8
  Top Layer w10: U1.PA22 -2622.81,1225 -2590,1192.19 R15.1@-2590,1190 ; R15.1 -1961.38,1196.95 -1948.33,1210 Q4.1@-1940,1210 ; Q4.1 -1904.1,1214.1 v1(-1850,1160) ; v2(-754.64,170) -749.64,165 -635,165 E23.1 ; E23.1@-630,139.18 E23.1@-630,150
  Bottom Layer w10: v1(-1850,1160) -1850,1150 -2180,820 -2180,763.43 -2106.57,690 -1270,690 v2@-743.44,163.44
MGND: C1.2 C2.2 C3.2 C4.1 C5.1 D1.4 D2.4 D3.4 D4.4 D5.4 D10.4 D11.4 D12.4 E3.1 Fault.2 J1.1 PS.3 PS.7 PS.8 PS.9 Q1.3 Q2.2 Q3.2 Q4.2 Q5.2 Q6.2 Q7.2 Q8.2 Q10.1 R3.1 R12.2 R13.2 R14.2 R15.2 R16.2 R17.2 R18.2 R19.2 S1.4 U1.GND | length 4387.3
  Top Layer w10: v3@-3890,2900 -3831.18,2900 C5.1 ; v3@-3890,2960 C4.1 ; Q10.1@-3750,2210 -3750,2198.9 -3708.76,2157.65 -3697.65,2157.65 v3(-3690,2150) ; v3(-3600,2440) -3600,2537.49 C1.2 -3567.79,2550 C1.2@-3567.79,2570 ; D1.4 v3@-3320,3060 ; Fault.2 -3527.8,2147.8 v3(-3490,2110) ; C3.2 -3343.75,2946.25 v3(-3290,3000) ; v3(-3260,2680) -3260,2685.68 -3234.56,2711.13 -3234.56,2718.2 -3192.76,2760 PS.3 ; C2.2@-3205.96,2041.85 -3204.1,2040 -3120,2040 v3(-3080,2000) ; PS.7@-2740.47,2660 -2740,2660.47 PS.8 PS.9 ; PS.7 -2659.13,2660 -2629.13,2690 R3.1@-2620.47,2690 ; R3.1 v3@-2620,2775.63 ; R17.2 -2570.87,350 v1(-2480,350) ; R18.2 -2575.87,600 v1(-2480,600) ; R16.2 -2473.48,826.52 v1@-2470,830 ; R19.2 -2471.09,1078.91 v1@-2470,1080 ; R15.2 -2574.78,1300 v1@-2460,1300 ; R12.2 -2572.39,1520 v1(-2460,1520) ; R14.2 -2474.13,1764.13 v1(-2470,1760) ; R13.2 -2475,1995 v1(-2470,1990) ; v1(-2060,1370) -1991.92,1370 -1949.38,1327.46 -1948.12,1327.46 -1942.26,1321.6 Q4.2 ; Q6.2 -1931.51,368.57 -1851.43,368.57 v1(-1850,370) ; Q7.2 -1935.08,610 v1(-1850,610) ; Q5.2 -1942.05,810 v1(-1850,810) ; Q8.2 -1931.51,1073.35 -1846.65,1073.35 v1(-1845,1075) ; Q3.2 -1937.25,1750 v1(-1870,1750) ; Q2.2 -1933.57,1970 v1(-1870,1970) ; v1(-1884.97,1249.23) -1881.98,1249.23 -1855.19,1222.44 -1810.76,1222.44 v1(-1807.36,1219.05) ; v1(-1630,760) -1625,755 -1625,645 v1(-1620,640) ; v1(-1510,1910) v1(-1130,1910) ; v1(-530,1990) -525,1990 -445,2070 v1(-440,2070) ; v1(-430,1850) -425,1850 -315,1960 v1(-310,1960) ; v1(-411.1,606.54) S1.4 ; v1(-340,1770) -280,1770 v1(-220,1830) ; v2(-120,560) E3.1
  Bottom Layer w10: D5.4@-1860,2030 D5.4 ; D2.4@-1650,1690 -1640,1700 D2.4
  other v1: -2460,820 -2460,1080 -2460,1290
  other v3: -2620,2785.63 -3900,2890 -3900,2960 -3340,3060
NetC2_1: C2.1 C3.1 C4.2 C5.2 F1.1 FB1.2 Q9.2 | length 2039.3
  Top Layer w10: F1.1 -3820,2361.54 -3750,2291.54 -3741.54,2291.54 -3480,2030 C2.1@-3310,2030 ; C4.2 C5.2 FB1.2 -3750,2820 -3416.94,2820 -3410,2820 C3.1 ; C3.1@-3431.58,2805.36 -3420.42,2816.53 C3.1@-3413.47,2816.53 ; C3.1@-3400.13,2830.13 -3394.76,2830.13 -3370,2805.36 Q9.2@-3370,2576.56 ; Q9.2 -3370,2440 -3330,2400 -3330,2046.25 C2.1
NetD1_3: D1.3 E1.1 FB1.1 Q10.2 | length 1300.4
  Top Layer w10: FB1.1@-3890,2800 -3890,2787.87 -3970,2707.87 -3970,2288.28 -3900.69,2218.98 -3828.98,2218.98 Q10.2@-3820,2210 ; FB1.1 -3883.78,2805.91 -3950,2872.13 -3950,3030 -3910,3070 E1.1 v2(-3780,3070) -3665,3070 D1.3
NetD17_1: D17.1 PS.4 PS.5 | length 344.6
  Top Layer w10: D17.1@-3270,2352.83 -3270,2470 PS.5@-3180,2560 ; PS.4 -3180.94,2560.47 PS.5@-3180.47,2560
NetE11_1: E11.1 U1.PA18 | length 2547.1
  Top Layer w10: E11.1 -4800,970 -3455,970 U1.PA18@-2915,430
  other v2: -4970,1150
NetE12_1: E12.1 U1.PA17 | length 2489.7
  Top Layer w10: E12.1 -5104.22,1039.22 -5079.22,1039.22 -4980,940 v2(-4970,940) -4810,780 -3380,780 -2934.57,334.57 -2933.1,334.57 U1.PA17@-2920,321.47
NetE13_1: E13.1 U1.PA16 | length 2443.5
  Top Layer w10: E13.1@-5105,825 -5011.24,825 -5003.47,817.24 -4952.76,766.53 -4856.24,670 -3355,670 U1.PA16
  other v2: -4970,800
NetFault_1: Fault.1 R20.2 | length 120
  Top Layer w10: Fault.1@-3390,2220 R20.2@-3390,2340
NetJ1_2: J1.2 Q10.3 | length 578.2
  Top Layer w10: J1.2 -3859.29,2149.29 -3800.79,2149.29 -3790,2138.5 Q10.3 Q10.3@-3790,2130
NetPS_6: PS.6 R2.1 R3.2 | length 327.9
  Top Layer w10: PS.6@-2730,2570 -2718.49,2570 -2709.87,2578.62 -2709.87,2590.13 -2685,2615 -2630,2615 R2.1
NetQ9_3: Q9.3 R20.1 | length 343.9
  Top Layer w10: R20.1@-3490,2330 -3480.43,2339.57 -3480.43,2360.79 -3410,2431.22 -3410,2637.09 Q9.3
SPARE_B: E15.1 J5.2 Q8.3 | length 4148.8
  Top Layer w10: v2@-2540,2430 E15.1 E15.1@-2540,2987.02 ; v1@-2130,1020 -2124.8,1025.2 Q8.3
  Bottom Layer w10: v1(-2140,1030) -2540,1430 -2540,2560 -2400,2700 -1168.2,2700 -968.2,2500 -910,2500 J5.2@-900,2510
  other v2: -2530,2425
SPARE_B_CTRL: E27.1 Q8.1 R19.1 U1.PA21 | length 3552.4
  Top Layer w10: E27.1 v2(-4970,1750) -4960,1740 -4960,1666.36 -4830,1536.36 -4766.18,1472.54 -4552.54,1472.54 -4450,1370 -3155,1370 -2920,1135 U1.PA21@-2920,1120 ; U1.PA21 -2769.35,984.35 -2604.35,984.35 R19.1@-2580,960 ; R19.1 -1961.38,970.65 -1942.02,990 Q8.1@-1940.05,990 ; Q8.1 Q8.1@-1940.05,990 ; Q8.1@-1940,990 Q8.1@-1940.05,990
STROBE: D11.3 E10.1 J5.6 Q6.3 | length 4304.9
  Top Layer w10: v1(-2130,310) v1@-2120,320 ; v2(-2030,170) -2020,160 E10.1 ; Q6.3 -2021.41,320 v1@-2120,320 ; v1(-900,410) -2030,410 v1@-2120,320
  Bottom Layer w10: v1(-2130,310) -2040,220 -2040,180 v2(-2030,170) ; v1(-900,410) -480,410 -220,670 -220,1752.21 -622.29,2154.5 -628.5,2154.5 -644,2170 -650,2170 -655.59,2175.59 J5.6
STROBE_CTRL: E25.1 Q6.1 R17.1 U1.PB16 | length 1376.5
  Top Layer w10: U1.PB16 -2670,385 -2670,326.1 -2608.46,264.57 -2593.9,250 R17.1@-2590,250 ; v2(-2700,160) E25.1 ; E25.1@-2580,160 E25.1 ; Q6.1@-1940,283.3 -1940,280 -1947.24,280 -1976.38,250.87 -2579.13,250.87 -2582.15,247.85 E25.1
TURN_SIGNAL_L: D4.3 E7.1 J4.1 J4.4 J5.3 Q3.3 | length 2812
  Top Layer w10: v1(-2070,1790) -2065.38,1785.38 -2065.38,1750 -2022.97,1707.59 Q3.3 ; J4.1@-1850,2490 -1850,2510.94 -1806.91,2554.04 -1685.03,2554.04 -1619.07,2620 -775.59,2620 J5.3 ; v2(-240,2570) -181.31,2570 E7.1
  Bottom Layer w10: v1@-2070,1780 v1(-2070,1790) -2040,1820 -2040,2104.41 J4.4 ; J4.4@-1860,2280 -1859.41,2280.59 J4.4 ; J4.1 J4.4 ; J5.3 -420,2500 -390,2530 D4.3@-370,2530 ; D4.3@-370,2526 -304,2526 v2@-250,2580
TURN_SIGNAL_R: D3.3 E8.1 J4.3 J4.6 J5.1 Q4.3 | length 3696.6
  Top Layer w10: v2@-2270,2420 v2(-2270,2425) -2270,2945.47 -2240,2975.47 E8.1@-2240,2990 ; v1@-2111.5,1251.5 Q4.3
  Bottom Layer w10: v2(-2270,2425) -2270,1390 v1(-2130,1250) ; v2@-2270,2430 -2270,2540 -2210,2600 -1490,2600 -1410,2520 J4.3@-1410,2500 ; J4.3 J4.6 -1410.59,2160.59 D3.3 ; J4.6@-1410,2300 -1395,2285 -1319.41,2285 J5.1
VCC: D17.2 E2.1 R2.2 S1.6 U1.VDD | length 90
  Top Layer w10: v2(-120,1000) E2.1
pads on no net: J2.3 J3.3 PS.10 S1.1 S1.2 S1.3 U1.PA00 U1.PA01 U1.PA02 U1.PA03 U1.PA04 U1.PA05 U1.PA06 U1.PA07 U1.PA08 U1.PA09 U1.PA10 U1.PA11 U1.PA12 U1.PA13 U1.PA14 U1.PA15 U1.PA27 U1.PA28 U1.PA30 U1.PA31 U1.PB00 U1.PB01 U1.PB02 U1.PB03 U1.PB04 U1.PB05 U1.PB06 U1.PB07 U1.PB08 U1.PB09 U1.PB10 U1.PB11 U1.PB12 U1.PB13 U1.PB14 U1.PB15 U1.PB30 U1.PB31
copper on no net: | length 10
  Top Layer w10: -420,550 -410,550
  other v4: -4210,2787.4 -1104.41,2787.4 -655.2,2787.4 -1859.41,2788.94 -1410.2,2788.94
  other v5: -5250,300 -300,300 -5250,2830 -300,2830

## Polygon pours and split planes (outlines as drawn)
VCC on Top Layer "NONET_L01_P002" (solid, remove dead copper, shelved, pour order 2): -5820,-115 -5780,3255 115,3320 165,-115
HORN on Top Layer "NONET_L01_P001" (solid, remove dead copper, shelved, pour order 1): -1970,1950 -620,1950 -620,500 -1970,500
MGND on Bottom Layer "NONET_L02_P000" (solid, shelved, pour order 0): -5835,3245 -6020,-165 300,-260 220,3355

## Silkscreen, mask and mechanical layers (free items; w line width, h text height)
Top Overlay:
  drawing of 35 lines, arcs and shapes, not listed
  text "12Vcrit" at -4010,3075 h60 r270
  text "RTSig" at -2210,2920 h60 r270
  text "Headlights" at -2350,2910 h60 r270
  text "Horn" at -2090,2840 h60 r270
  text "SpareB" at -2490,2810 h60 r270
  text "LTSig" at -100,2575 h60 r270
  text "HeadCTRL" at -5490,2350 h60
  text "Brake" at -325,2180 h60
  text "12Vcrit" at -4235,2095 h60
  text "HornCTRL" at -5495,2080 h60
  text "J5 PINS:" at -1480,2030 h60
  text "1: TURN_SIG_R" at -1620,1950 h60
  text "HEAD CNTL" at -2530,1880 h60
  text "2: SPARE" at -1630,1880 h60
  text "LED L" at -310,1860 h60
  text "3: TURN_SIG_L" at -1630,1810 h60
  text "4: BRAKE" at -1630,1740 h60
  text "SpareB" at -5520,1725 h60
  text "L TURN" at -2430,1650 h60
  text "5: CEN_BRAKE" at -1630,1650 h60
  text "F/RSelect" at -5495,1625 h60
  text "6: SROBE" at -1630,1570 h60
  text "HORN CNTL" at -2530,1420 h60
  text "Spare1" at -5505,1260 h60
  text "Hal Rev 5 / Thomas Gaul / Jake Hafele / Bryce Staver" at -730,1240 h60
  text "R TURN" at -2470,1170 h60
  text "VCC" at -200,1150 h60
  text "Spare2" at -5505,1025 h60
  text "J4 PINS:" at -1440,980 h60
  text "SPARE" at -2470,940 h60
  text "1: TURN_SIG_L" at -1580,890 h60
  text "Spare3" at -5520,805 h60
  text "2: HEADLIGHT" at -1580,800 h60
  text "MGND" at -240,760 h60
  text "BR CNTL" at -2500,720 h60
  text "Is broke?" at -5460,700 h60
  text "3: TURN_SIG_R" at -1580,700 h60
  text "4: TURN_SIG_L" at -1580,620 h60
  text "5: HORN" at -1570,530 h60
  text "MGND" at -720,510 h60
  text "6: TURN_SIG_R" at -1580,450 h60
  text "CEN BR CNTL" at -2520,430 h60
  text "ST CNTL" at -2440,220 h60
  text "CenBCTRL" at -1330,210 h60
  text "Strobe" at -2010,190 h60
  text "CenBrake" at -1700,40 h60
  text "BRAKECTRL" at -2425,30 h60
  text "LED R" at -820,30 h60
  text "STROBECTRL" at -3050,20 h60
Bottom Overlay:
  drawing of 23 lines, arcs and shapes, not listed
Mechanical 13:
  lines w10: -5545,2829.37 cw(c-5245,2829.37) -5245,3129.37 ; -5545,2830 -5545,310 ccw(c-5245,310) -5245,10 -300,10 ; -5245,3130 -300,3130 ; -300.63,10 ccw(c-300.63,310) -0.63,310 ; -300.63,3129.37 cw(c-300.63,2829.37) -0.63,2829.37 ; 0,310 0,2825

## Text inside footprints (layer, text, board x,y; h text height)
U1: Top Overlay "Compute S+" at -4372.56,763.19 h196.85 r0.33; Top Overlay "1" at -4602.09,276.57 h60